# EAGLE board simple_device (EAGLE 8.2.1)
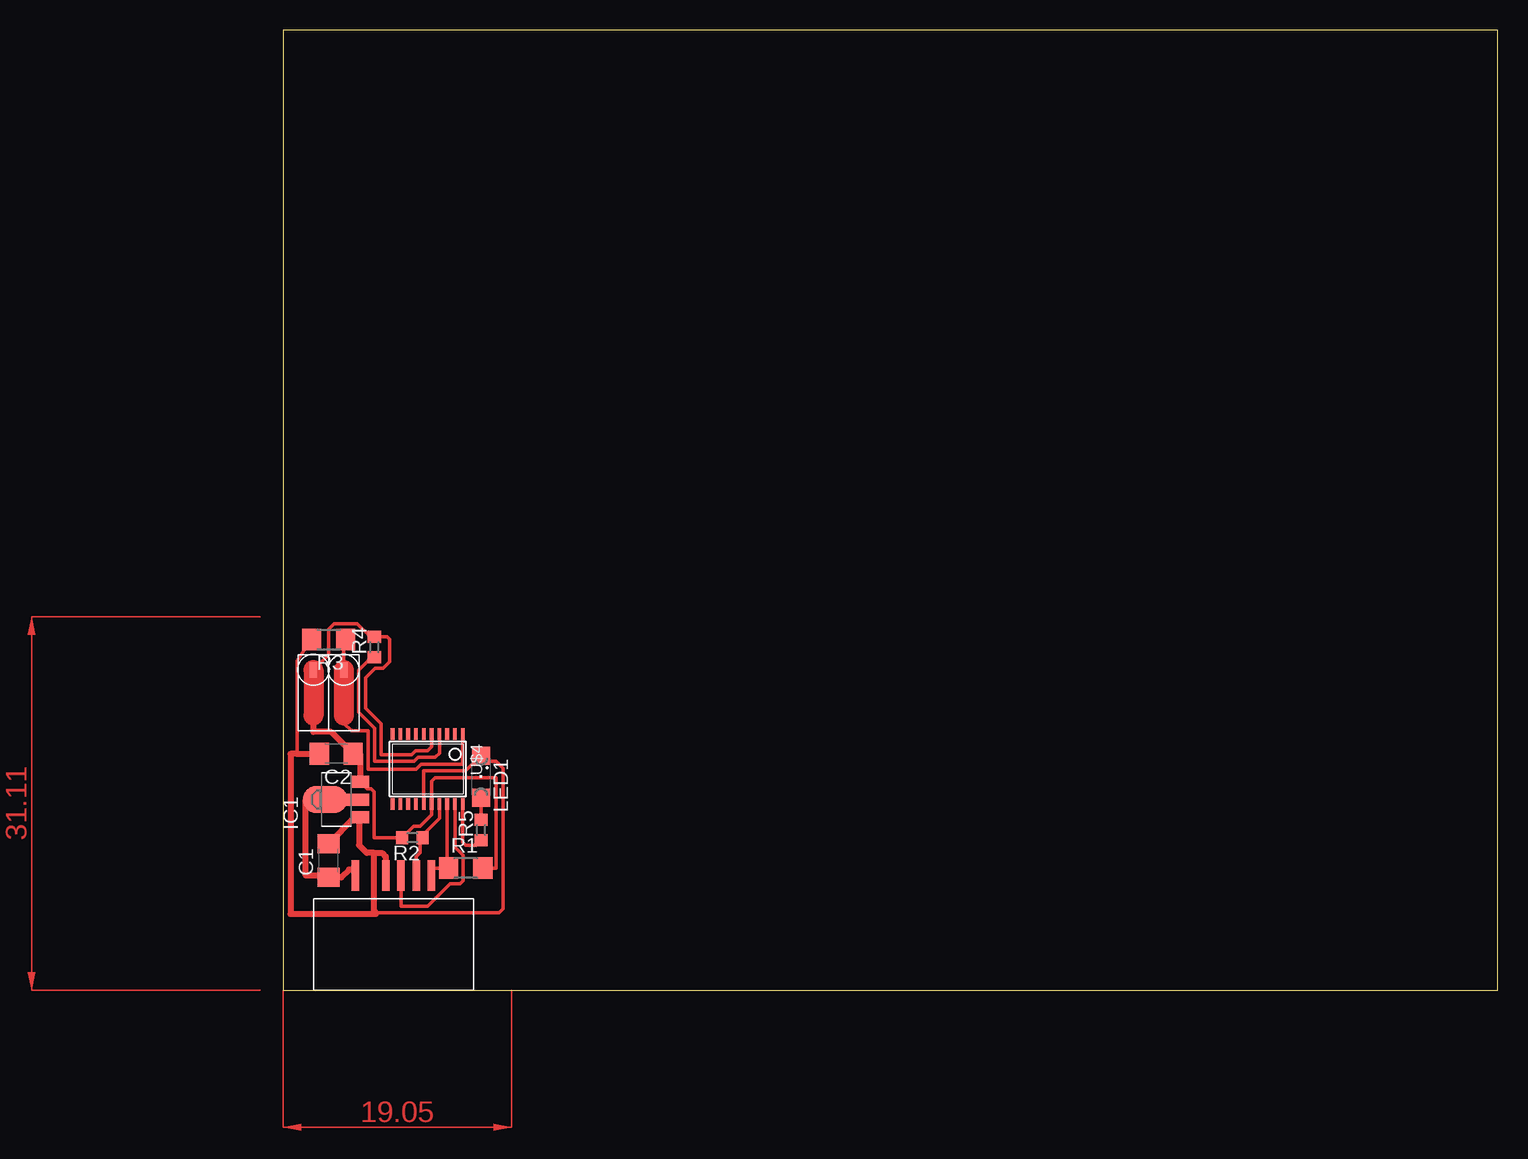
[diagram p0: board, top side]

Size 101.27 x 80 mm. Coordinates in mm from the lower left corner, seen from the top.
Outline: 0,0 101.27,0 101.27,80 0,80 0,0
Copper layers (1*16): Top 0.035mm / dielectric 1.5mm / Bottom 0.035mm
Design rules "default *": minimum track width 6mil, minimum drill 0.35mm, track to track 10mil, track to pad 10mil, pad to pad 10mil, via to via 10mil, smd to smd 10mil, copper to edge 40mil, drill to drill 6mil, minimum pad ring 10mil, minimum via ring 8mil, stop-mask expansion 4mil, vias tented up to drill 0mil, thermal gap 10mil

## Footprints (pad centres in the part's own frame; a part is rotated, then mirrored left to right if it is on the bottom)
C1206 = smd 1.6 x 1.8: 1 -1.4,0; 2 1.4,0
SOT89 = smd 1 x 1.5: 1 -1.499,-1.981; 3 1.499,-1.981 | smd 1 x 2: 2 0,-1.727 | smd 2.2 x 3.7: 2@1 0,0.94
SML1206 = smd 1.5 x 1.5: A 1.75,0; C -1.75,0
R1206 = smd 1.6 x 1.803: 1 -1.422,0; 2 1.422,0
R0603 = smd 1 x 1.1: 1 -0.85,0; 2 0.85,0
RJ12_SMD = smd 0.635 x 1.27: 5V -2.857,6.35; GND -0.318,6.35; GND1 -0.318,5.08; INT 0.953,6.35; INT1 0.953,5.08; SCL 2.223,6.35; SCL1 2.223,5.08; SDA 3.493,6.35; SDA1 3.493,5.08; VCC1 -2.857,5.08
GOLDPIN_2_SMD = smd 0.66 x 1.27: 1 -1.27,1.27; 2 1.27,1.27
TSSOP20 = smd 0.305 x 0.991: 1 -2.925,-2.918; 2 -2.275,-2.918; 3 -1.625,-2.918; 4 -0.975,-2.918; 5 -0.325,-2.918; 6 0.325,-2.918; 7 0.975,-2.918; 8 1.625,-2.918; 9 2.275,-2.918; 10 2.925,-2.918; 11 2.925,2.918; 12 2.275,2.918; 13 1.625,2.918; 14 0.975,2.918; 15 0.325,2.918; 16 -0.325,2.918; 17 -0.975,2.918; 18 -1.625,2.918; 19 -2.275,2.918; 20 -2.925,2.918

## Placement (x,y rotation side)
C1  [C1206]  3.81,10.79 90 top
C2  [C1206]  4.45,19.68 180 top
IC1  MCP170333MB  [SOT89]  4.45,15.88 90 top
LED1  [SML1206]  16.51,17.78 270 top
R1  [R1206]  15.24,10.16 0 top
R2  [R0603]  10.79,12.7 180 top
R3  [R1206]  3.81,29.21 180 top
R4  [R0603]  7.62,28.57 90 top
R5  [R0603]  16.51,13.34 90 top
U$2  RJ12SMD  [RJ12_SMD]  8.89,3.81 0 top
U$3  GOLDPIN_2  [GOLDPIN_2_SMD]  3.81,27.94 180 top
U$4  STM32F042FXPX  [TSSOP20]  12.06,18.41 180 top

## Library data of the parts
C1 C2 = rcl
IC1 = linear
LED1 = led
R1-R5 = resistor
U$2 U$3 = gumyns
U$4 = stm32f0

## Nets
3.3V: C2.1 IC1.3 R1.2 R2.2 R4.2 U$3.2 U$4.5 U$4.16
5V: C1.1 IC1.2@1 U$2.5V
A0: U$4.6
A1: U$4.7
A2: U$4.8
A3: U$4.9
A4: U$4.10
BOOT: R3.1 U$3.1 U$4.1
F0: U$4.2
F1: U$4.3
GND: C1.2 C2.2 IC1.1 LED1.C R3.2 U$2.GND U$4.15
INT: U$2.INT U$4.19
N$1: R5.1 U$4.20
N$2: LED1.A R5.2
RST: R4.1 U$4.4
SCL: R2.1 U$2.SCL U$4.17
SDA: R1.1 U$2.SDA U$4.18

## Tracks (layer width: path | path; a pad name or v marks a point on that pad's centre or on a via)
3.3V
  Top 0.305: IC1.3 7.02,16.78 7.34,16.78 7.58,16.54 7.58,12.74 7.62,12.7 R2.2 10.9,13.66 11.43,13.66 12.39,14.62 U$4.16 12.39,17.39 12.7,17.7 17.78,17.7 17.78,10.16 R1.2 | U$4.5 12.39,20.26 12.06,19.94 11.05,19.94 10.72,19.61 8.2,19.61 8.2,22.17 6.88,23.5 6.88,26.04 7.67,26.82 8.34,26.82 8.89,27.37 8.89,29.21 8.68,29.43 R4.2 7.29,29.43 6.2,30.52 4.26,30.52 3.81,30.06 3.81,27.94 U$3.2
  Top 0.508: IC1.3 6.43,19.68 C2.1 4.02,21.51 2.54,21.51 2.54,22.86
5V
  Top 0.508: U$2.5V 5.91,10.03 5.51,10.03 4.87,9.39 C1.1 3.68,9.53 1.91,9.53 1.91,15.88 IC1.2@1
BOOT
  Top 0.305: R3.1 5.08,29.21 U$3.1 | U$4.1 14.99,18.82 11.51,18.82 11.11,18.41 7.09,18.41 7.09,21.59 5.71,21.59 5.08,22.23 5.08,22.86
GND
  Top 0.305: 18.34,16.51 18.34,16.74 | 18.34,16.51 18.34,6.75 18.01,6.43 7.75,6.43 | U$4.15 11.74,18.26 15.22,18.26 16.49,19.53 LED1.C 16.99,19.05 17.78,19.05 18.34,18.49 18.34,16.51 | R3.2 1.17,27.42 1.17,19.68
  Top 0.508: C1.2 5.99,14.38 IC1.1 6.35,14.3 6.35,12.06 6.98,11.43 7.62,11.43 | 7.62,11.43 8.26,11.43 8.57,11.11 U$2.GND | 7.62,11.43 7.62,6.56 7.75,6.43 7.75,6.35 0.64,6.35 0.64,19.68 1.17,19.68 C2.2
INT
  Top 0.305: U$2.INT 9.84,6.99 12.06,6.99 13.93,8.85 14.79,8.85 15.02,9.09 15.02,11.23 14.34,11.91 U$4.19
N$1
  Top 0.305: R5.1 16.09,12.06 15.24,12.06 14.99,12.31 U$4.20
N$2
  Top 0.305: 16.73,14.54 R5.2 LED1.A
RST
  Top 0.305: R4.1 7.4,27.73 6.32,26.64 6.32,23.14 7.64,21.82 7.64,19.05 10.95,19.05 11.28,19.38 12.7,19.38 13.04,19.72 U$4.4
SCL
  Top 0.305: U$2.SCL 11.11,11.11 11.43,11.43 11.43,12.48 R2.1 11.64,12.91 13.04,14.31 U$4.17
SDA
  Top 0.305: U$2.SDA R1.1 13.69,10.22 U$4.18
(copper drawn outside any net)
  shapes: Top area x2